# Altium PCB Reg_therm_Capt.PcbDoc
Units mm, origin at the board's own origin, x right, y up, seen from the top; angles counter-clockwise.
Board outline 16.51 x 19.56 mm, 2 copper layers (Top Layer, Bottom Layer), stack 1.586 mm thick; 6 components, 3 nets, 13 pads, 1 vias.
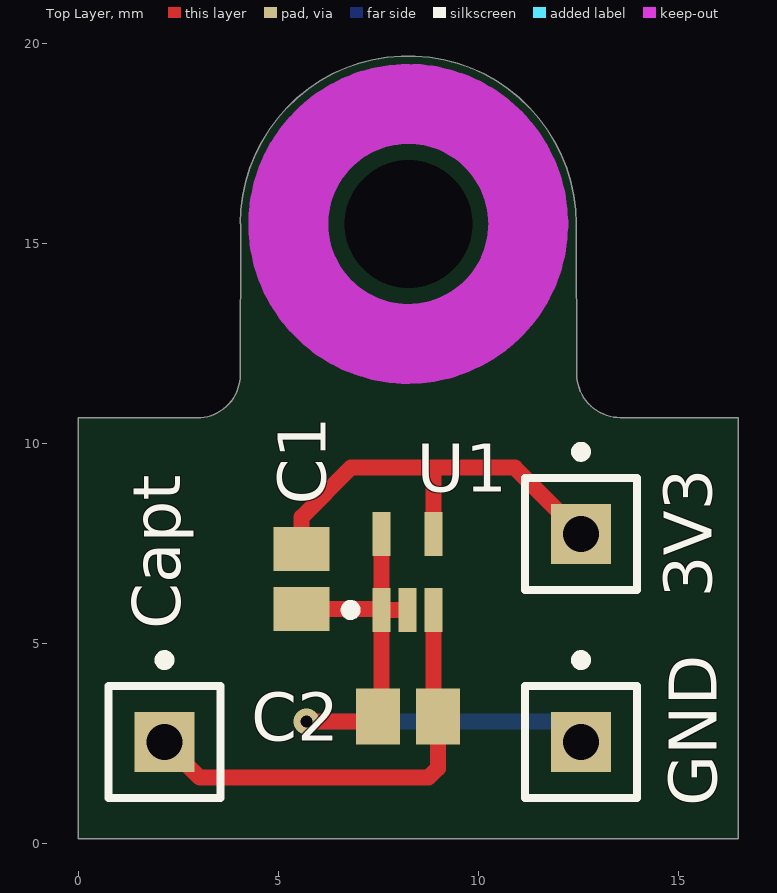
[diagram p0: Top Layer view]
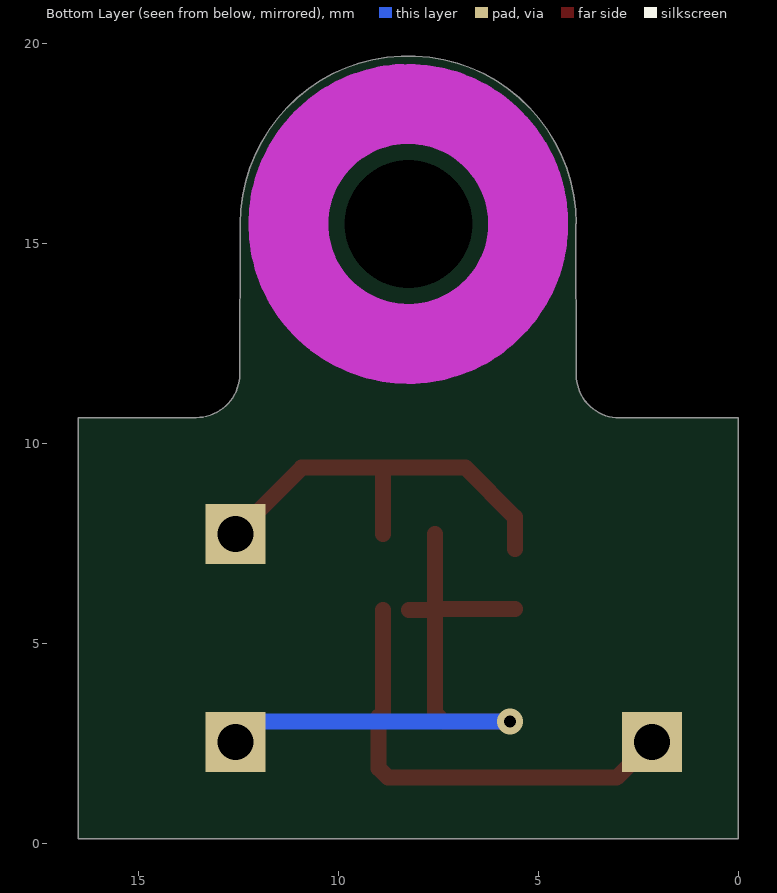
[diagram p1: Bottom Layer view, seen from below]

## Layer stack, top to bottom
Top Solder: solder mask 0.0102, Solder Resist, Dk 3.5
Top Layer: signal copper 0.018
Dielectric1: core 1.55, FR-4, Dk 4.8
Bottom Layer: signal copper 0.018
Bottom Solder: solder mask 0.0102, Solder Resist, Dk 3.5

## Board outline
0,0.127 0,10.643 2.975,10.643 ccw(c2.975,11.723) 4.055,11.723 4.064,15.494 4.055,15.494 cw(c8.255,15.494) 12.455,15.494 12.468,11.743 ccw(c13.56,11.743) 13.56,10.652 16.51,10.643 16.51,0.127

## Design rules (kind name [scope] priority, off if disabled: settings)
BoardOutlineClearance [All] p1: gap=0.25 ignorepadtopadclearanceinfootprint=FALSE except(0: Arc-SplitContinuation Track-SplitContinuation SMDPad-SplitContinuation THPad-SplitContinuation Via-SplitContinuation Fill-SplitContinuation Poly-SplitContinuation Region-SplitContinuation Text-SplitContinuation)
Clearance Clearance-xPP-xTP-xTT [All] p1: gap=0.15 ignorepadtopadclearanceinfootprint=FALSE except(0: Arc-Hole Track-Hole SMDPad-Hole THPad-Hole Via-Hole Fill-Hole Poly-Hole Region-Hole Text-Hole)
ComponentClearance [All] p1: gap=0.25 collisioncheckmode=3 verticalgap=0.25 showdistances=FALSE
DiffPairsRouting [All] p1: maxlimit=0.25 minlimit=0.25 mostfreqgap=0.25 toplayer_minwidth=0.381 toplayer_maxwidth=0.381 toplayer_prefwidth=0.381 bottomlayer_minwidth=0.381 bottomlayer_maxwidth=0.381 bottomlayer_prefwidth=0.381 maxuncoupledlength=12.5
Height [All] p1: minheight=0 maxheight=25 prefheight=12.5
HoleSize HoleSize-PTH [All] p1: absolutevalues=TRUE maxlimit=10 minlimit=0.25 maxpercent=80.000 minpercent=20.000
HoleToHoleClearance [All] p1: gap=0.35 allowstackedmicrovias=TRUE
MinimumAnnularRing "Minimum IAR  >0.45mm" [((ObjectKind = 'Pad') OR (ObjectKind = 'Via')) And (Layer = 'MultiLayer') And (HoleDiameter > AsMM(0.45))] p1: minimumring=0.175 // minimum inner annular ring for pads > 0.45mm finished hole size
MinimumAnnularRing "Minimum IAR <=0.45mm" [((ObjectKind = 'Pad') OR (ObjectKind = 'Via')) And (Layer = 'MultiLayer') And (HoleDiameter <= AsMM(0.45))] p2: minimumring=0.175 // minimum inner annular ring for pads <= 0.45mm finished hole size
MinimumSolderMaskSliver [All] p1: minsoldermaskwidth=0.08
PasteMaskExpansion [All] p1: expansion=-0.025
PlaneClearance PlaneClearance-IPI [All] p1: clearance=0.25
PlaneConnect [All] p1: planeconnectstyle=Relief reliefexpansion=0.175 reliefentries=4 reliefconductorwidth=0.2 reliefairgap=0.2
PolygonConnect PolygonConnect-xTW [All] p1: connectstyle=Relief reliefconductorwidth=0.2 reliefentries=4 polygonreliefangle="90 Angle" airgapwidth=0.2
RoutingCorners [All] p1: cornerstyle=45-Degree minsetback=2.5 maxsetback=2.5
RoutingVias RoutingViasES [All] p1: holewidth=0.3 width=0.65 viastyle="Through Hole" minholewidth=0.25 minwidth=0.61 maxholewidth=0.45 maxwidth=0.8 // finishet hole size <= 0.45mm
SilkToSilkClearance [All] p1: silktosilkclearance=0.2
SilkToSolderMaskClearance SilkscreenOverComponentPads [IsPad] p1: minsilkscreentomaskgap=0.2 clearancetoexposedcopper=TRUE
SolderMaskExpansion [All] p1: expansion=0 istentingtop=FALSE
UnRoutedNet [All] p1: checkbadconnections=TRUE
Width Width-xTW [All] p1: maxlimit=1.5 minlimit=0.15 preferedwidth=0.2
17 further rules are at their usual default settings.

## Components (designator, comment, footprint, x,y, rotation, side; value= is the part's Value field where it differs from the comment)
3V3 "3V3" PIN1 12.573,7.747 r0 top (schematic designator X1)
C1 "Cap" C0805 5.588,6.616 r270 top value=0.1uF
C2 "Cap" C0805 8.243,3.175 r180 top value=1nF
Capt "Capt_temp" PIN1 2.159,2.54 r0 top (schematic designator X2)
GND "GND" PIN1 12.573,2.54 r0 top (schematic designator X3)
U1 "MAX6612MXK+" MAXM-X5+1_M 8.24,6.792 r90 top

## Footprints (in the part's own frame and the unit in brackets; to place one, negate y for a bottom-side part, rotate by r counter-clockwise, add the part's x,y. Pads: shape width x height; smd on the part's side, far side on the other; paste and mask are expansions set on the pad)
C0805 [mm] "Chip Capacitor, Body 2.0x1.3mm, IPC High Density"
  rect 1.1x1.4 smd: 1(-0.75,0) 2(0.75,0)
  body extent -1.1,-0.72 1.1,0.72, height 1.4
MAXM-X5+1_M [mm] "SOT23, 5-Leads, Body 2x1.25mm, Pitch 0.65mm, IPC Low Density"
  rect 1.1x0.45 smd: 1(-0.95,0.65) 2(-0.95,0) 3(-0.95,-0.65) 4(0.95,-0.65) 5(0.95,0.65)
  silkscreen extent -1.07,1.3 -0.83,1.55, body extent -0.67,-1.1 0.67,1.1, height 1.1
PIN1 [mm] "Generic Antenna; 1 Lead"
  rect 1.5x1.5 hole 0.9: 1(0,0)
  silkscreen extent -1.4,-1.4 1.4,2.17

## Part data
3V3 Capt GND: library part Berg, "CONN HEADER VERT 1POS", Supplier="Stock ES"
C1: "Cap 100nF", LatestRevisionDate=17-Jul-2002, LatestRevisionNote="Re-released for DXP Platform.", PackageDescription="Radial Cap, Thru-Hole; 2 Leads; 0.3 in Pin Spacing", PackageReference=RAD-0.3, Published=8-Jun-2000, Publisher="Altium Limited"
C2: "Cap 1nF", LatestRevisionDate=17-Jul-2002, LatestRevisionNote="Re-released for DXP Platform.", PackageDescription="Radial Cap, Thru-Hole; 2 Leads; 0.3 in Pin Spacing", PackageReference=RAD-0.3, Published=8-Jun-2000, Publisher="Altium Limited"
U1: library part CMP-0253-01154-1, "High-Slope, Low-Power, Analog Temperature Sensor, -55 to 150 degC, 5-Pin SOT23 (X5+1), Pb-Free", Generic Part Number=MAX6612, Code_JEDEC=MO-203, ComponentLink1Description="Manufacturer URL", ComponentLink1URL=http://www.maximintegrated.com/, ComponentLink2Description=Datasheet, ComponentLink2URL=http://datasheets.maximintegrated.com/en/ds/MAX6612-MAX6612MXK.pdf, ComponentLink3Description="Package Specification", ComponentLink3URL=http://pdfserv.maximintegrated.com/package_dwgs/21-0076.PDF, DatasheetVersion="Rev. 0", Interface=Analog, Mounting Technology="Surface Mount", PackageDescription="5-Pin SC70 Transistor Package (X5+1), Body 2 x 1.25 mm, Pitch 0.65 mm", PackageReference=X5+1, PackageVersion="Rev. F, 06/2011", Parasite Pwr.=No, PartNumber=MAX6612MXK+

## Free pads (board coordinates)
  round 1.524 hole 3.2: 2(8.255,15.494)

## Via types
v1: diameter 0.65, hole 0.3, Top Layer to Bottom Layer, 1 vias

## Nets (pads, with @x,y where several pads share a name; then routed paths per layer and width w, separated by ;. In a path a pad name is that pad's centre, name@x,y a point inside that pad or via, vN(x,y) a via of type N, cw(c..) or ccw(c..) an arc to the next point about the centre after c; other vN are vias at no path point)
NetC1_1: 3V3.1 C1.1 U1.4 | length 10.6
  Top Layer w0.4: C1.1 5.588,8.163 6.823,9.398 8.89,9.398 ; U1.4 8.89,9.398 ; 3V3.1 10.922,9.398 8.89,9.398
NetC1_2: C1.2 C2.2 GND.1 U1.1 U1.2 U1.5 | length 16.2
  Top Layer w0.4: C1.2 7.566,5.866 U1.1 ; v1(5.715,3.048) 7.366,3.048 C2.2 7.59,3.272 U1.1 ; U1.5 U1.1 ; U1.2 U1.1
  Bottom Layer w0.4: v1(5.715,3.048) 12.065,3.048 GND.1
NetC2_1: C2.1 Capt.1 U1.3 | length 11.3
  Top Layer w0.4: Capt.1 3.048,1.651 8.759,1.651 8.993,1.885 C2.1 8.89,3.278 U1.3

## Keep-outs
Keep-Out Layer:
  circle w2: c8.255,15.494 r3

## Silkscreen, mask and mechanical layers (free items; w line width, h text height)
Board Outline (ES):
  lines w0.254: 4.055,15.494 cw(c8.255,15.494) 12.455,15.494 12.468,11.743 ccw(c13.56,11.743) 13.56,10.652 16.51,10.643 16.51,0.127 0,0.127 0,10.643 2.975,10.643 ccw(c2.975,11.723) 4.055,11.723 4.064,15.494

## Dimensions
0,10.643 to 8.255,19.694 on Top Dims
0,0.127 to 16.51,0.127 on Top Dims
0,10.643 to 0,0.127 on Top Dims